# Altium PCB R100.230.070.001-00 Commutator.PcbDoc
Units mm, origin at the board's own origin, x right, y up, seen from the top; angles counter-clockwise.
Board outline 136 x 85 mm, 2 copper layers (Top, Bottom), stack 2.14 mm thick; 28 components, 21 nets, 83 pads, 192 vias.
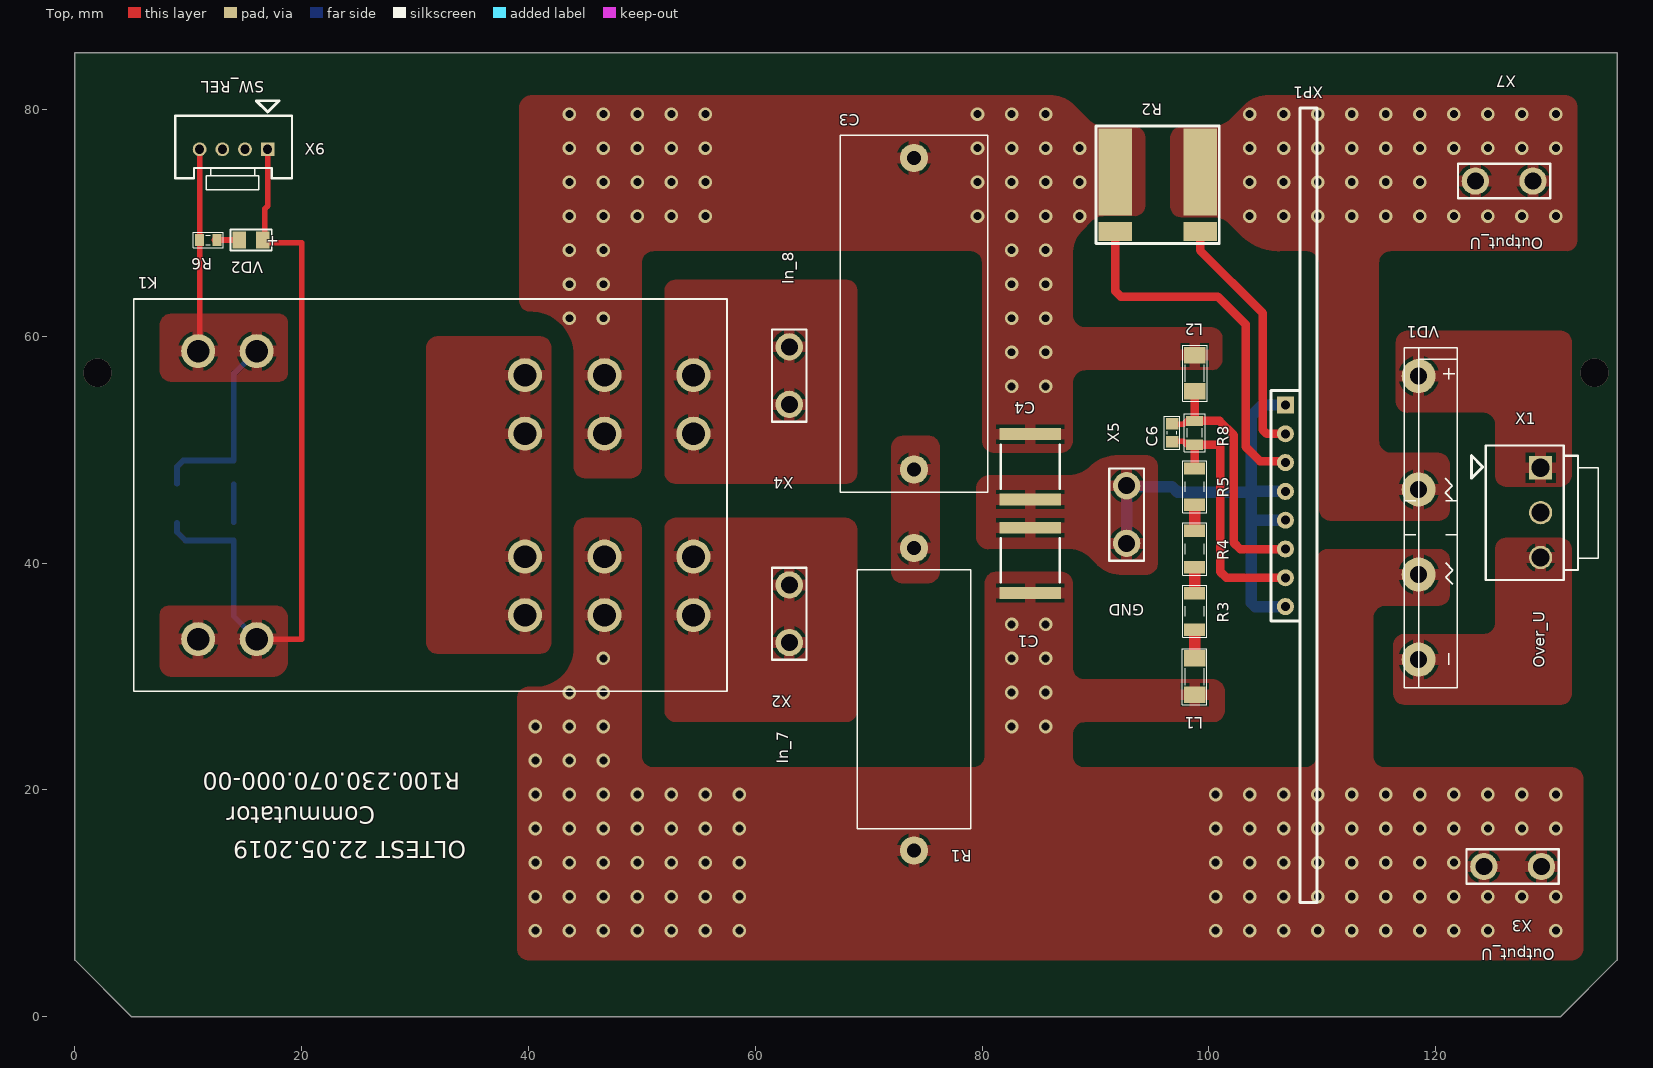
[diagram p0: Top view]
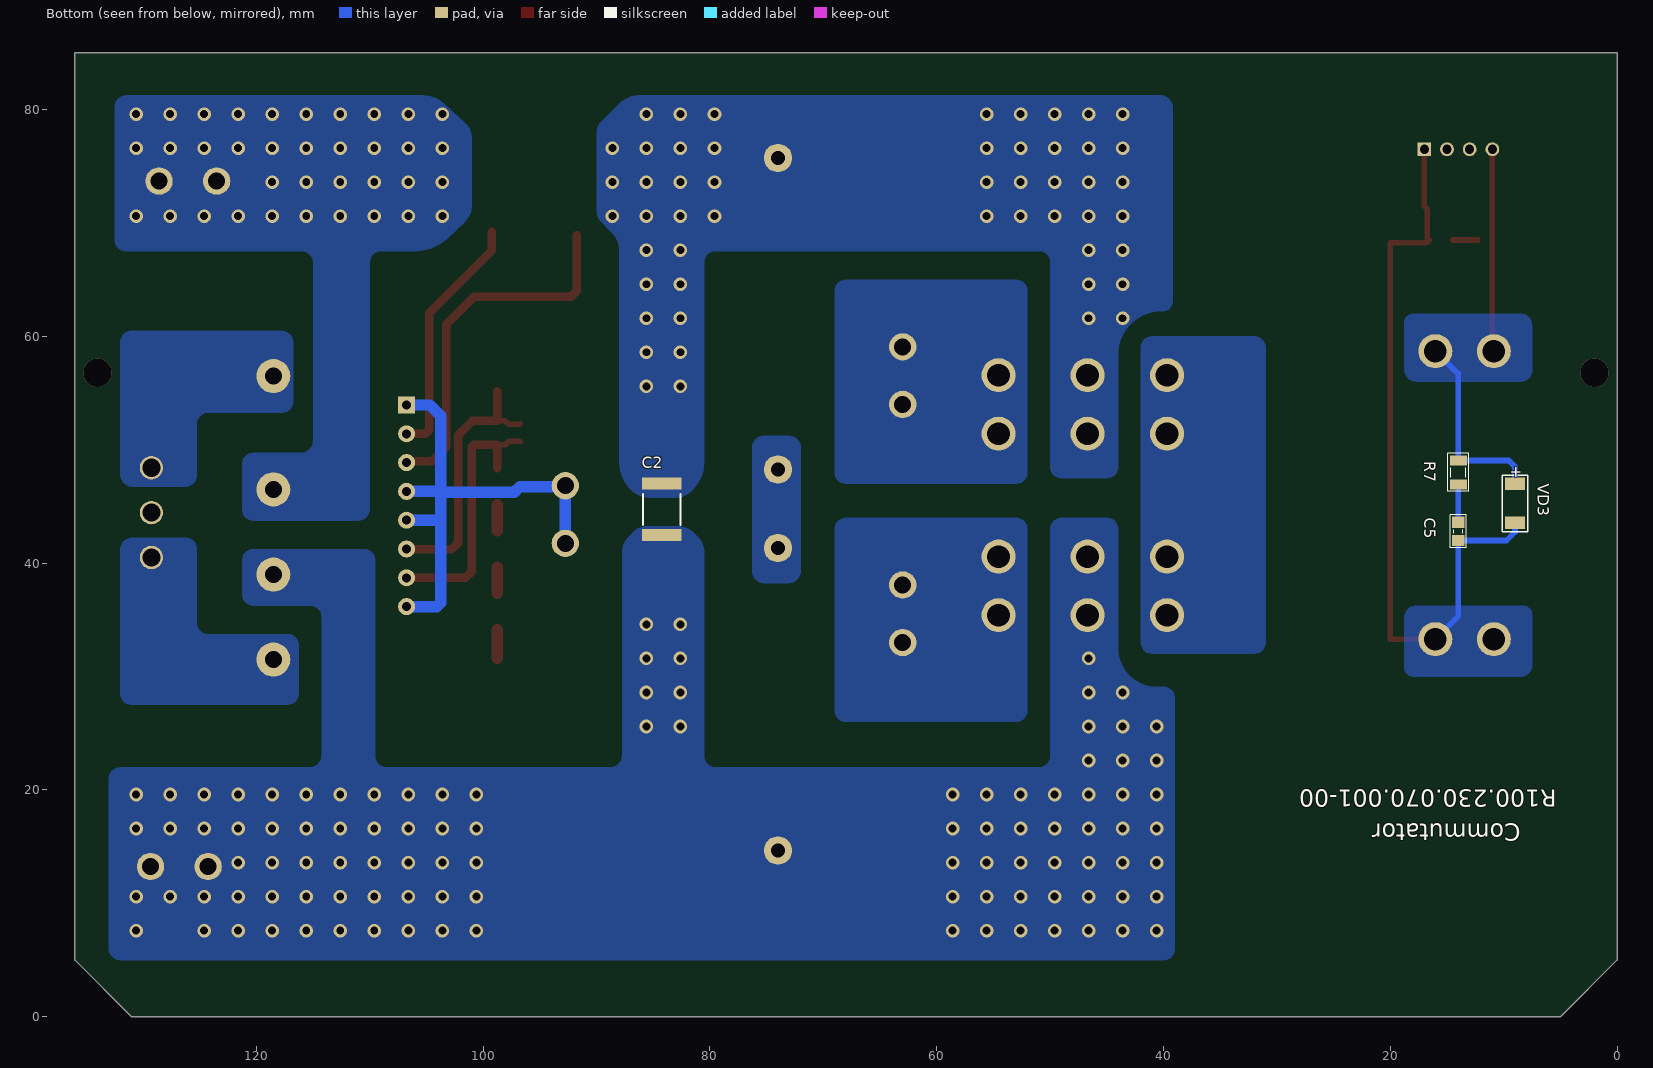
[diagram p1: Bottom view, seen from below]
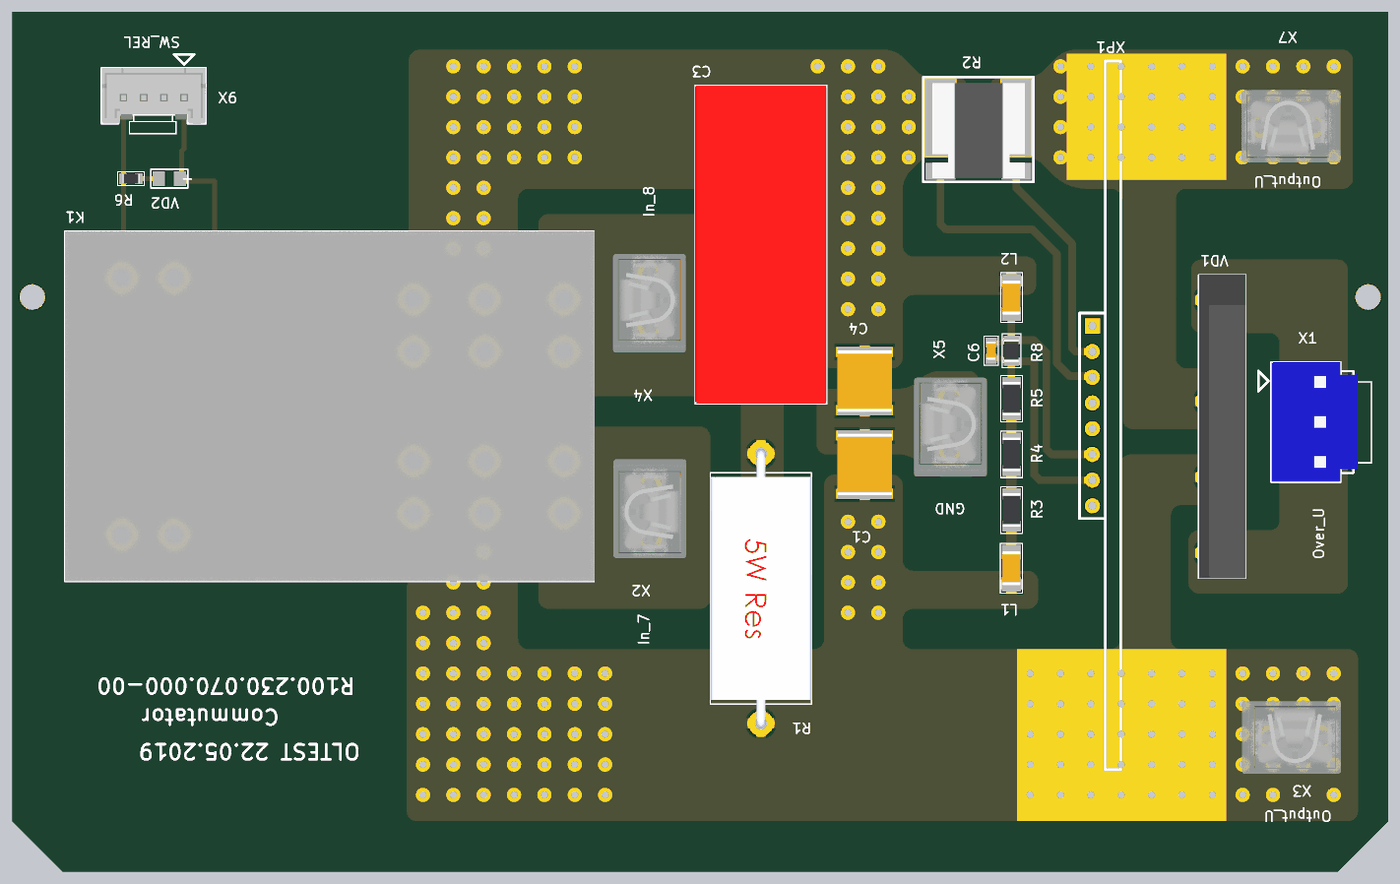
[diagram p2: 3D render of the assembled board from above, using the file's embedded part models]
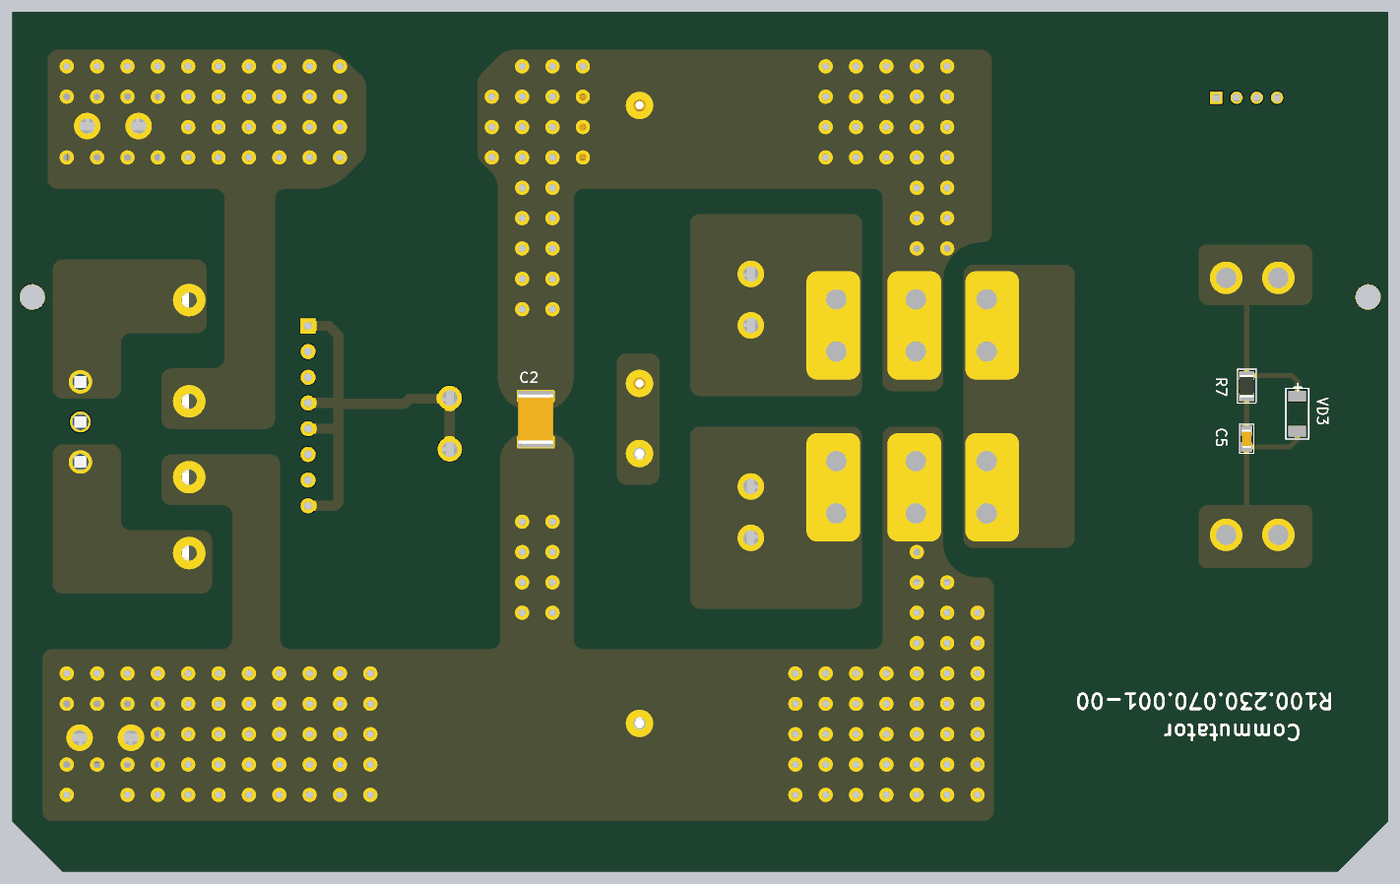
[diagram p3: 3D render of the assembled board from below, using the file's embedded part models]

## Layer stack, top to bottom
Top Solder: solder mask 0.0102, Solder Resist, Dk 3.5
Top: signal copper 0.07
Dielectric 1: dielectric 2, FR-4, Dk 4.8
Bottom: signal copper 0.07
Bottom Solder: solder mask 0.0102, Solder Resist, Dk 3.5

## Board outline
5,0 0,5 0,85 136,85 136,5 131,0

## Design rules (kind name [scope] priority, off if disabled: settings)
BoardOutlineClearance [All] p1: gap=0.5
Clearance Clearance_1 [(ObjectKind = 'Pad') And (Component = 'R2') And (Name = 'R2-4') vs InNet('VOUT-')] p1: gap=0.3
Clearance Clearance_Vout+- [InNet('VOUT+') or InNet('VOUT-')] p2: gap=1
Clearance Clearance_VOUT+-_4_+-Vin [InNet('VOUT+_4') or InNet('VOUT-_4') vs InNet('-VIN_200') or InNet('+VIN_200')] p3: gap=2
Clearance Clearance_VOUT+_4_VOUT-_4 [InNet('VOUT+_4') vs InNet('VOUT-_4')] p4: gap=2
Clearance Clearance_Vout_all [InNet('VOUT+_4') or InNet('VOUT-_4') or  InNet('VOUT+_3') or InNet('VOUT-_3') or InNet('VOUT+_2') or InNet('VOUT-_2') or InNet('VOUT+_1') or InNet('VOUT-_1') or InNet('VOUT+') or InNet('VOUT-')] p5: gap=1.2
Clearance Clearance_xp3_xp2_-Vin_200 [((ObjectKind = 'Pad') And (Component = 'XP3') And (Name = 'XP3-5')) or ((ObjectKind = 'Pad') And (Component = 'XP2') And (Name = 'XP2-5')) vs InNet('-VIN_200')] p6: gap=0.5
Clearance Clearance_+Vin_200_-Vin_200 [InNet('+VIN_200') vs InNet('-VIN_200')] p7: gap=2.2
Clearance Clearance_-Vin_200_All [InNet('-VIN_200') or InNet('+VIN_200')] p8: gap=1.2
Clearance [All] p9: gap=0.3 except(0.4: Arc-Poly Track-Poly SMDPad-Poly THPad-Poly Via-Poly Fill-Poly Poly-Poly)
ComponentClearance ComponentClearance_HS1 [(ObjectKind = 'Component') And (Name = 'HS1') or     (ObjectKind = 'Component') And (Name = 'HS2') or     (ObjectKind = 'Component') And (Name = 'HS3') or     (ObjectKind = 'Component') And (Name = 'HS4')] p1: gap=0.1 collisioncheckmode=3 verticalgap=0.1 showdistances=FALSE
ComponentClearance [All] p2: gap=0.254 collisioncheckmode=3 verticalgap=0.254 showdistances=FALSE
Height [All] p1: minheight=0 maxheight=63.5 prefheight=12.7
HoleSize [All] p1: absolutevalues=TRUE maxlimit=6.35 minlimit=0.025 maxpercent=80.000 minpercent=20.000
PolygonConnect PolygonConnect_shunt [(ObjectKind = 'Pad') And (Component = 'R2') And (Name = 'R2-1') or (ObjectKind = 'Pad') And (Component = 'R2') And (Name = 'R2-3')] p1: connectstyle=Direct reliefconductorwidth=0.254 reliefentries=4 polygonreliefangle="90 Angle" airgapwidth=0.254
PolygonConnect PolygonConnect_snnaber [(ObjectKind = 'Pad') And (Component = 'R2') And (Name = 'R2-1')  or (ObjectKind = 'Pad') And (Component = 'VD2') And (Name = 'VD2-2')  or(ObjectKind = 'Pad') And (Component = 'C29') And (Name = 'C29-2') or (ObjectKind = 'Poly') And (Net = 'NetC29_1') or (ObjectKind = 'Pad') And (Component = 'VD6') And (Name = 'VD6-2') or (ObjectKind = 'Pad') And (Component = 'R8') And (Name = 'R8-1') or (ObjectKind = 'Poly') And (Net = 'N2') And (Name = 'Top Overlay-No Net')] p2: connectstyle=Direct reliefconductorwidth=0.254 reliefentries=4 polygonreliefangle="90 Angle" airgapwidth=0.254
PolygonConnect PolygonConnect_1 [IsStitchingVia] p3: connectstyle=Direct reliefconductorwidth=0.254 reliefentries=4 polygonreliefangle="90 Angle" airgapwidth=0.254
PolygonConnect PolygonConnect_bottom_fill [OnLayer('Bottom')] p4: connectstyle=Direct reliefconductorwidth=0.254 reliefentries=4 polygonreliefangle="90 Angle" airgapwidth=0.254
PolygonConnect PoligonConnect_top [OnLayer('Top')] p5: connectstyle=Relief reliefconductorwidth=1 reliefentries=4 polygonreliefangle="90 Angle" airgapwidth=0.3
RoutingVias [All] p1: holewidth=0.7 width=1.2 viastyle="Through Hole" minholewidth=0.5 minwidth=1 maxholewidth=5.08 maxwidth=7.62
SolderMaskExpansion [All] p1: expansion=0.102
Width Width_+Vin_200 [InNet('+VIN_200')] p1: maxlimit=50 minlimit=0.762 preferedwidth=10 checkconnectedcopper=TRUE
Width [InNet('No Net')] p2: maxlimit=0.254 minlimit=0.254 preferedwidth=0.254
27 further rules are at their usual default settings.

## Components (designator, comment, footprint, x,y, rotation, side; value= is the part's Value field where it differs from the comment)
C1 "4700pF X1/Y2" SMD_C_2220 84.25,40.25 r270 top
C2 "0.1u" SMD_C_1812 84.25,44.75 r90 bottom
C3 "1uF 275VAC" MKP_W13_H24_L31.5_LS27.5 74,62 r270 top
C4 "4700pF X1/Y2" SMD_C_2220 84.25,48.5 r270 top
C5 "0.1u" SMD_C_0603 14,42.8 r270 bottom
C6 "100p" SMD_C_0603 96.75,51.5 r270 top
K1 "Value" T92S11 34,46 r90 top
L1 "BLM31PG601SN1" SMD_L_1206 98.75,30 r90 top
L2 "BLM31PG601SN1" SMD_L_1206 98.75,56.75 r270 top
R1 "4.7" "PRW 5W 1050" 74,28 r270 top
R2 "3mOm" "WSL3637 3mOm" 99.22,74.5 r180 top
R3 "30K" SMD_R_1206 98.75,35.75 r270 top
R4 "30K" SMD_R_1206 98.75,41.25 r270 top
R5 "30K" SMD_R_1206 98.75,46.75 r270 top
R6 "5K6" SMD_R_0603 11.75,68.5 r0 top
R7 "300" SMD_R_0805 14,48 r270 bottom
R8 "1.5K" SMD_R_0805 98.75,51.5 r270 top
VD1 "GBJ2560" GSIB-5S 118.5,44 r270 top
VD2 "LL-S172GC-2A" SMD_LED_LL_Green 15.541,68.5 r180 top
VD3 "PMLL4148" SOD80C 9,45.275 r270 bottom
X1 "B3P-VH" B3P-VH 129.25,48.42 r270 top
X2 "63849-1" 63849-1+insulator(154719-1) 63,38.08 r270 top
X3 "63849-1" 63849-1+insulator(154719-1) 124.25,13.25 r0 top
X4 "63849-1" 63849-1+insulator(154719-1) 63,54 r90 top
X5 "63849-1" 63849-1+insulator(154719-1) 92.75,41.75 r90 top
X6 "Sherlock 4" 35362-0450 17,76.5 r0 top
X7 "63849-1" 63849-1+insulator(154719-1) 128.58,73.7 r180 top
XP1 "То_MeasOutUIBoard" XP(MeasOutUIBoard) 106.75,45.06 r0 top

## Footprints (in the part's own frame and the unit in brackets; to place one, negate y for a bottom-side part, rotate by r counter-clockwise, add the part's x,y. Pads: shape width x height; smd on the part's side, far side on the other; paste and mask are expansions set on the pad)
35362-0450 [mil]
  rect 48x48 / inner round 0 / far side rect 48x48 hole 31.5 mask+4.97: 1(0,0)
  round 48 / inner round 0 / far side round 48 hole 31.5 mask+4.97: 2(-78.73,0) 3(-157.47,0) 4(-236.22,0)
  silkscreen extent -321,-140 85,168, body extent -321,-102 85,116, height 335
63849-1+insulator(154719-1) [mil]
  round 95 hole 59.06: 1(0,0) 2(200,0)
  silkscreen extent -60,-60 260,60, body extent -106,-141 279,142, height 955
B3P-VH [mm]
  rect 2.057x2.057 / inner round 0 / far side round 2.057 hole 1.6 mask+0.128: 1(0,0)
  round 2.057 / inner round 0 / far side round 2.057 hole 1.6 mask+0.128: 2(3.96,0) 3(7.92,0)
  silkscreen extent -1.95,-6.1 9.91,5.08, body extent -1.95,-4.78 9.87,3.72, height 10.93
GSIB-5S [mm]
  round 3 hole 1.5: 1(-12.5,0) 2(-2.5,0) 3(5,0) 4(12.5,0)
  silkscreen extent -15,-1.27 15,3.4, body extent -15,-1.2 15,3.4, height 28
MKP_W13_H24_L31.5_LS27.5 [mm]
  round 2.5 hole 1.2: 1(-13.735,0) 2(13.735,0)
  silkscreen extent -15.73,-6.5 15.77,6.5, body extent -15.76,-6.5 15.74,6.5, height 24
"PRW 5W 1050" [mm]
  round 2.5 hole 1.2: 1(-13.335,0) 2(13.335,0)
  silkscreen extent -11.43,-5 11.43,5, body extent -13.79,-5 13.78,5, height 10.01
SMD_C_0603 [mm]
  rect 1x1.1 smd: 1(-0.8,0) 2(0.8,0)
  silkscreen extent -1.45,-0.7 1.45,0.7, body extent -0.9,-0.45 0.9,0.45, height 0.7
SMD_C_1812 [mm] "Chip Capacitor, 2-Leads, Body 4,50x3,20mm, IPC Medium Density"
  rect 1.05x3.5 smd: 1(-2.275,0) 2(2.275,0)
  silkscreen extent -1.35,-1.65 1.35,1.65, body extent -2.45,-1.75 2.45,1.75, height 2
SMD_C_2220 [mm]
  rect 1.05x5.4 smd: 1(-2.875,0) 2(2.875,0)
  silkscreen extent -1.95,-2.6 1.95,2.6, body extent -3.05,-2.7 3.05,2.7, height 2
SMD_L_1206 [mm]
  rect 1.45x1.9 smd: 1(-1.6,0) 2(1.6,0)
  silkscreen extent -2.47,-1.07 2.45,1.1, body extent -1.7,-0.9 1.7,0.9, height 1.6
SMD_LED_LL_Green [mil] "Chip Diode, 2-Leads, Body 2,00x1,25mm, IPC Low Density"
  rect 47x59 smd: 1(-41,0) 2(41,0)
  silkscreen extent -72,-36 72,36, body extent -41,-27 41,27, height 31
SMD_R_0603 [mm]
  rect 0.8x1.05 smd: 1(-0.775,0) 2(0.775,0)
  silkscreen extent -1.33,-0.67 1.33,0.67, body extent -0.82,-0.48 0.82,0.48, height 0.5
SMD_R_0805 [mm]
  rect 0.9x1.5 smd: 1(-1.05,0) 2(1.05,0)
  silkscreen extent -1.68,-0.92 1.68,0.92, body extent -1.1,-0.7 1.1,0.7, height 0.5
SMD_R_1206 [mm]
  rect 1.1x1.85 smd: 1(-1.6,0) 2(1.6,0)
  silkscreen extent -2.3,-1.07 2.3,1.07, body extent -1.65,-0.87 1.65,0.87, height 0.6
SOD80C [mm] "MELF Diode, 2-Leads, Body 3,50x1,53mm, IPC Medium Density"
  rect 1.1x1.75 smd: 1(-1.725,0) 2(1.725,0)
  silkscreen extent -2.5,-1.12 2.5,1.12, body extent -1.85,-0.8 1.85,0.8, height 1.6
T92S11 [mm]
  round 3 hole 2: 0(12.7,23.13) 1(-12.7,23.13) 2(10.58,-20.55) 3(10.58,-5.69) 4(10.58,-12.7) 6(-10.58,-20.55) 7(-10.58,-5.69) 8(-10.58,-12.7) 10(12.7,17.97) 11(-12.7,17.97) 21(5.42,-20.55) 31(5.42,-5.69) 41(5.42,-12.7) 61(-5.42,-20.55) 71(-5.42,-5.69) 81(-5.42,-12.7)
  silkscreen extent -17.3,-23.5 17.3,28.8, body extent -17.27,-23.55 17.27,28.78, height 30.75
"WSL3637 3mOm" [mm]
  rect 2.95x7.64 smd: 1(0,0) 3(7.47,0)
  rect 2.95x1.66 smd: 2(0,5.26) 4(7.47,5.26)
  silkscreen extent -1.7,-4.05 9.18,6.32, body extent -0.87,-3.45 8.27,5.95, height 0.64
XP(MeasOutUIBoard) [mm]
  rect 1.5x1.5 hole 0.8: 1(0,8.89)
  round 1.5 hole 0.8: 2(0,6.35) 3(0,3.81) 4(0,1.27) 5(0,-1.27) 6(0,-3.81) 7(0,-6.35) 8(0,-8.89)
  silkscreen extent -1.27,-34.98 2.8,35.06, body extent -1.27,-34.98 2.79,35.06, height 45

## Part data
C1 C4: library part "C X1Y2 4700pF SMD 2220 250Vac 10%", "SMD C2220 MURATA 250Vac 10% X7R X1Y2"
C2: library part "C1812 0.1u 630V 10%", "SMD C 1812 MURATA 630V 10% X7R"
C3: library part "MKP-X2 1uF 275VAC +-20% L31.5 H24 W13 LS27.5", "Polypropelene MKP-X2 L31.5 H24 W13 LS27.5"
C5: library part "C0603 0.1u 50V 10%", "SMD C 0603 MURATA 50V 10% X7R"
C6: library part "C0603 100p 100V 5%", "SMD C 0603 MURATA 100V 5% NP0"
K1: library part T92S11D12-12, "400VAC 30A DPDT 24VDC"
L1 L2: "600R 1.5A (100MHz)"
R1: library part "PRW 4.7 5W +-5%", "Выводной PRW 5W 4R7 +-5%"
R2: library part "WSL3637 3mOm 3W", "WSL3637 1mOm 3W 1% 50ppm"
R3 R4 R5: library part "R1206 30K 0.1%", "SMD R 1206 VISHAY 0.25W 2000V 0.1% 25ppm"
R6: library part "R0603 5K6 1%", "SMD R 0603 VISHAY 0.1W 75V 1% 100ppm"
R7: library part "R0805 300 1%", "SMD R 0805 VISHAY 0.125W 150V 1% 100ppm"
R8: library part "R0805 1.5K 0.1%", "SMD R 0805 VISHAY 0.125W 150V 0.1% 25ppm"
VD1: "25A 600V"
VD2: "LED Green SMD"
VD3: "If=0.2A, Vf=1V Vrrm=100V Diode (SOD80C)"
X1: "VH Top, 10A 250V 3.96mm"
X2 X3 X4 X5 X7: "PCB, 6.3х0.8, hole"
X6: library part 35362-0450, "Sherlock 4 Top, 2A 125V 2mm"
XP1: library part Plata_MeasOutUIBoard, "to MeasOutUIBoard"

## Via types
v1: diameter 1.2/1.2 (per signal layer), hole 0.7, Top to Bottom, 190 vias
v2: diameter 2.5, hole 2.5, Top to Bottom, 2 vias

## Nets (pads, with @x,y where several pads share a name; then routed paths per layer and width w, separated by ;. In a path a pad name is that pad's centre, name@x,y a point inside that pad or via, vN(x,y) a via of type N, cw(c..) or ccw(c..) an arc to the next point about the centre after c; other vN are vias at no path point)
GND: C1.1 C4.2 X5.1 X5.2 XP1.1 XP1.4 XP1.5 XP1.8 | length 45.4
  Bottom w1: X5.1 X5.2 92.83,46.75 96.75,46.75 97.25,46.25 103.75,46.25 ; XP1.8 104.08,36.17 103.75,36.5 103.75,43.75 ; XP1.5 103.79,43.79 103.75,43.75 ; XP1.4 103.83,46.33 103.75,46.25 ; XP1.1 104.7,53.95 103.75,53 103.75,46.25 ; 103.75,43.75 103.75,46.25
I_U+: R2.2 XP1.2 | length 21.9
  Top w0.75: R2.2 99.22,67.58 104.75,62.05 104.75,51.75 105.09,51.41 XP1.2
I_U-: R2.4 XP1.3 | length 32.5
  Top w0.75: R2.4@91.75,68.9 91.75,64 92.25,63.5 100.8,63.5 103.25,61.05 103.25,50.25 104.5,49 106.62,49 XP1.3
N9: C3.2 R1.1
N10: L1.2 R3.2 | length 2.5
  Top w1: L1.2 R3.2
N11: R3.1 R4.2 | length 2.3
  Top w1: R3.1 R4.2
N12: R4.1 R5.2 | length 2.3
  Top w1: R4.1 R5.2
NetC5_1: C5.1 R7.2 | length 3.4
  Bottom w0.5: C5.1 R7.2
NetK1_2: K1.2 K1.21 X4.1 X4.2
NetK1_3: K1.3 K1.7 K1.31 K1.71
NetK1_6: K1.6 K1.61 X2.1 X2.2
NetR2_1: R2.1 VD1.2 X7.1 X7.2
  other v1: 103.6,70.6 106.6,70.6 109.6,70.6 112.6,70.6 115.6,70.6 118.6,70.6 121.6,70.6 124.6,70.6 127.6,70.6 130.6,70.6 103.6,73.6 106.6,73.6 109.6,73.6 112.6,73.6 115.6,73.6 118.6,73.6 103.6,76.6 106.6,76.6 109.6,76.6 112.6,76.6 115.6,76.6 118.6,76.6 121.6,76.6 124.6,76.6 127.6,76.6 130.6,76.6 103.6,79.6 106.6,79.6 109.6,79.6 112.6,79.6 115.6,79.6 118.6,79.6 121.6,79.6 124.6,79.6 127.6,79.6 130.6,79.6
NetR6_2: R6.2 VD2.2 | length 2.2
  Top w0.5: R6.2@12.275,68.5 VD2.2
NetVD1_1: VD1.1 X1.1
NetVD1_4: VD1.4 X1.3
SW_REL_COM: K1.0 K1.10 R6.1 R7.1 VD3.1 X6.4 | length 35.1
  Top w0.5: K1.0 11,58.83 X6.4
  Bottom w0.5: VD3.1 9,48.5 9.55,49.05 R7.1 14,56.75 14.08,56.75 K1.10
SW_REL_PLUS: C5.2 K1.1 K1.11 VD2.1 VD3.2 X6.1 | length 66.3
  Top w0.5: K1.11 20,33.3 20,68.25 16.833,68.25 VD2.1 16.75,68.667 16.75,71.25 17,71.5 X6.1
  Bottom w0.5: VD3.2 9,42.75 9.75,42 C5.2 14,35.33 K1.11
U_U+: C6.2 R5.1 R8.2 XP1.7 | length 23.6
  Top w0.5: C6.2 96.8,50.75 97.75,50.75 98.05,50.45 R8.2
  Top w0.75: R5.1 R8.2 100.8,50.45 101,50.25 101,39.25 101.54,38.71 XP1.7
U_U-: C6.1 L2.2 R8.1 XP1.6 | length 23
  Top w0.5: C6.1 96.8,52.25 97.75,52.25 98.05,52.55 R8.1
  Top w0.75: L2.2 R8.1 100.95,52.55 102.2,51.3 102.2,41.8 102.75,41.25 XP1.6
VOUT+: C1.2 C2.1 K1.8 K1.81 L1.1 R1.2 VD1.3 X3.1 X3.2
  other v1: 40.6,7.6 43.6,7.6 46.6,7.6 49.6,7.6 52.6,7.6 55.6,7.6 58.6,7.6 100.6,7.6 103.6,7.6 106.6,7.6 109.6,7.6 112.6,7.6 115.6,7.6 118.6,7.6 121.6,7.6 124.6,7.6 130.6,7.6 40.6,10.6 43.6,10.6 46.6,10.6 49.6,10.6 52.6,10.6 55.6,10.6 58.6,10.6 100.6,10.6 103.6,10.6 106.6,10.6 109.6,10.6 112.6,10.6 115.6,10.6 118.6,10.6 121.6,10.6 124.6,10.6 127.6,10.6 130.6,10.6 40.6,13.6 43.6,13.6 46.6,13.6 49.6,13.6 52.6,13.6 55.6,13.6 58.6,13.6 100.6,13.6 103.6,13.6 106.6,13.6 109.6,13.6 112.6,13.6 115.6,13.6 118.6,13.6 121.6,13.6 40.6,16.6 43.6,16.6 46.6,16.6 49.6,16.6 52.6,16.6 55.6,16.6 58.6,16.6 100.6,16.6 103.6,16.6 106.6,16.6 109.6,16.6 112.6,16.6 115.6,16.6 118.6,16.6 121.6,16.6 124.6,16.6 127.6,16.6 130.6,16.6 40.6,19.6 43.6,19.6 46.6,19.6 49.6,19.6 52.6,19.6 55.6,19.6 58.6,19.6 100.6,19.6 103.6,19.6 106.6,19.6 109.6,19.6 112.6,19.6 115.6,19.6 118.6,19.6 121.6,19.6 124.6,19.6 127.6,19.6 130.6,19.6 40.6,22.6 43.6,22.6 46.6,22.6 40.6,25.6 43.6,25.6 46.6,25.6 82.6,25.6 85.6,25.6 43.6,28.6 46.6,28.6 82.6,28.6 85.6,28.6 46.6,31.6 82.6,31.6 85.6,31.6 82.6,34.6 85.6,34.6
VOUT-: C2.2 C3.1 C4.1 K1.4 K1.41 L2.1 R2.3
  other v1: 82.6,55.6 85.6,55.6 82.6,58.6 85.6,58.6 43.6,61.6 46.6,61.6 82.6,61.6 85.6,61.6 43.6,64.6 46.6,64.6 82.6,64.6 85.6,64.6 43.6,67.6 46.6,67.6 82.6,67.6 85.6,67.6 43.6,70.6 46.6,70.6 49.6,70.6 52.6,70.6 55.6,70.6 79.6,70.6 82.6,70.6 85.6,70.6 88.6,70.6 43.6,73.6 46.6,73.6 49.6,73.6 52.6,73.6 55.6,73.6 79.6,73.6 82.6,73.6 85.6,73.6 88.6,73.6 43.6,76.6 46.6,76.6 49.6,76.6 52.6,76.6 55.6,76.6 79.6,76.6 82.6,76.6 85.6,76.6 88.6,76.6 43.6,79.6 46.6,79.6 49.6,79.6 52.6,79.6 55.6,79.6 79.6,79.6 82.6,79.6 85.6,79.6
pads on no net: X1.2 X6.2 X6.3
copper on no net:
  other v2: 2,56.8 134,56.8

## Polygon pours and split planes (outlines as drawn)
NetR2_1 on Bottom "Poly" (solid, pour order 234): 113.5,81.25 131.45,81.25 cw(c131.45,80.2) 132.5,80.2 132.5,68.5 cw(c131.5,68.5) 131.5,67.5 116,67.5 ccw(c116,66.5) 115,66.5 115,50.8 ccw(c116.05,50.8) 116.05,49.75 120.25,49.75 cw(c120.25,48.75) 121.25,48.75 121.25,44.75 cw(c120.25,44.75) 120.25,43.75 111.05,43.75 cw(c111.05,44.8) 110,44.8 110,66.5 ccw(c109,66.5) 109,67.5 106.105,67.5 cw(c106.105,71.92) 103.068,68.709 101.677,70.024 cw(c103.164,71.597) 101,71.597 101,77.41 cw(c102.972,77.41) 101.627,78.852 103.326,80.437 cw(c105.388,78.227) 105.388,81.25
VOUT- on Bottom "Poly" (solid, pour order 228): 45,47.5 49,47.5 ccw(c49,48.5) 50,48.5 50,66.6 cw(c50.9,66.6) 50.9,67.5 79.5,67.5 cw(c79.5,66.5) 80.5,66.5 80.5,49.121 ccw(c84.725,49.065) 80.8,47.5 ccw(c84.105,49.054) 81.646,46.354 ccw(c83.104,47.811) 83.104,45.75 85.255,45.75 ccw(c85.255,48.152) 86.954,46.454 ccw(c84.427,48.98) 88,48.98 88,67.534 cw(c90.331,67.534) 88.683,69.183 89.588,70.088 ccw(c88.593,71.083) 90,71.083 90,77.959 ccw(c88.693,77.959) 89.617,78.883 87.954,80.546 ccw(c86.255,78.848) 86.255,81.25 42.25,81.25 40.25,81.25 ccw(c40.25,80.2) 39.2,80.2 39.2,63.075 ccw(c40.066,63.075) 40.062,62.209 40.202,62.208 cw(c40.183,58.391) 44,58.391 44,58.251 44,48.5 ccw(c45,48.5)
VOUT+ on Bottom "Poly" (solid, pour order 226): 45,44 49,44 cw(c49,43) 50,43 50,24 50,23 ccw(c51,23) 51,22 52,22 79.5,22 ccw(c79.5,23) 80.5,23 80.5,40.876 cw(c82.61,40.876) 81.118,42.368 81.473,42.723 cw(c82.745,41.452) 82.745,43.25 85.596,43.25 cw(c85.597,41.673) 86.712,42.788 87.117,42.383 cw(c85.59,40.856) 87.75,40.855 87.75,23.05 ccw(c88.8,23.05) 88.8,22 108.5,22 ccw(c108.5,23) 109.5,23 109.5,40.2 cw(c110.55,40.2) 110.55,41.25 115.5,41.25 120.25,41.25 cw(c120.25,40.25) 121.25,40.25 121.25,37.25 cw(c120.25,37.25) 120.25,36.25 115.25,36.25 ccw(c115.25,35.25) 114.25,35.25 114.25,23.05 ccw(c115.3,23.05) 115.3,22 132,22 cw(c132,21) 133,21 133,6 cw(c132,6) 132,5 40,5 cw(c40,6) 39,6 39,28.1 cw(c40,28.1) 40,29.1 40.6,29.1 ccw(c40.6,32.5) 44,32.5 44,43 cw(c45,43)
NetVD1_1 on Bottom "Poly" (solid, pour order 238): 116.75,59.45 116.75,54.25 ccw(c117.75,54.25) 117.75,53.25 124.25,53.25 cw(c124.25,52.25) 125.25,52.25 125.25,47.75 ccw(c126.25,47.75) 126.25,46.75 130.95,46.75 ccw(c130.95,47.8) 132,47.8 132,59.5 ccw(c131,59.5) 131,60.5 117.8,60.5 ccw(c117.8,59.45)
NetK1_3 on Bottom "Poly" (solid, pour order 222): 32,60 41,60 cw(c41,59) 42,59 42,33 cw(c41,33) 41,32 32,32 cw(c32,33) 31,33 31,59 cw(c32,59)
NetK1_6 on Bottom "Poly" (solid, pour order 218): 52,43 52,27 ccw(c53,27) 53,26 68,26 ccw(c68,27) 69,27 69,43 ccw(c68,43) 68,44 53,44 ccw(c53,43)
NetK1_2 on Bottom "Poly" (solid, pour order 212): 52,64 52,48 ccw(c53,48) 53,47 68,47 ccw(c68,48) 69,48 69,64 ccw(c68,64) 68,65 53,65 ccw(c53,64)
NetVD1_4 on Bottom "Poly" (solid, pour order 240): 116.25,32.75 116.25,28.55 ccw(c117.3,28.55) 117.3,27.5 131,27.5 ccw(c131,28.5) 132,28.5 132,41.2 ccw(c130.95,41.2) 130.95,42.25 126.25,42.25 ccw(c126.25,41.25) 125.25,41.25 125.25,34.75 cw(c124.25,34.75) 124.25,33.75 117.25,33.75 ccw(c117.25,32.75)
SW_REL_COM on Bottom "Poly" (solid, pour order 248): 7.5,61 7.5,57 ccw(c8.5,57) 8.5,56 17.7,56 ccw(c17.7,57.05) 18.75,57.05 18.75,61.25 ccw(c18,61.25) 18,62 8.5,62 ccw(c8.5,61)
SW_REL_PLUS on Bottom "Poly" (solid, pour order 250): 7.5,35.5 7.5,31 ccw(c8.5,31) 8.5,30 18,30 ccw(c18,30.75) 18.75,30.75 18.75,35.25 ccw(c17.75,35.25) 17.75,36.25 8.25,36.25 ccw(c8.25,35.5)
N9 on Bottom "Poly" (solid, pour order 256): 72,50.2 72,39.3 ccw(c73.05,39.3) 73.05,38.25 75.25,38.25 ccw(c75.25,39.25) 76.25,39.25 76.25,50.25 ccw(c75.25,50.25) 75.25,51.25 73.05,51.25 ccw(c73.05,50.2)
VOUT+ on Top "Poly" (solid, pour order 224): 45,44 49,44 cw(c49,43) 50,43 50,25.704 50,23 ccw(c51,23) 51,22 53.124,22 79.2,22 ccw(c79.2,23.05) 80.25,23.05 80.25,38.25 cw(c81.25,38.25) 81.25,39.25 86.95,39.25 cw(c86.95,38.2) 88,38.2 88,30.8 ccw(c89.05,30.8) 89.05,29.75 100.35,29.75 cw(c100.35,28.7) 101.4,28.7 101.4,27 cw(c100.4,27) 100.4,26 89.1,26 ccw(c89.1,24.9) 88,24.9 88,23 ccw(c89,23) 89,22 108.5,22 ccw(c108.5,23) 109.5,23 109.5,40.2 cw(c110.55,40.2) 110.55,41.25 120.25,41.25 cw(c120.25,40.25) 121.25,40.25 121.25,37.25 cw(c120.25,37.25) 120.25,36.25 115.55,36.25 ccw(c115.55,35.2) 114.5,35.2 114.5,23 ccw(c115.5,23) 115.5,22 132,22 cw(c132,21) 133,21 133,6 cw(c132,6) 132,5 40,5 cw(c40,6) 39,6 39,28.1 cw(c40,28.1) 40,29.1 40.6,29.1 ccw(c40.6,32.5) 44,32.5 44,43 cw(c45,43)
VOUT- on Top "Poly" (solid, pour order 230): 45,47.5 49,47.5 ccw(c49,48.5) 50,48.5 50,66.5 cw(c51,66.5) 51,67.5 79,67.5 cw(c79,66.5) 80,66.5 80,50.8 ccw(c81.05,50.8) 81.05,49.75 86.95,49.75 ccw(c86.95,50.8) 88,50.8 88,55.9 cw(c89.1,55.9) 89.1,57 100.2,57 ccw(c100.2,58) 101.2,58 101.2,59.8 ccw(c100.2,59.8) 100.2,60.8 89.1,60.8 cw(c89.1,61.9) 88,61.9 88,67.334 cw(c90.814,67.334) 88.824,69.324 89.688,70.188 cw(c90.683,69.193) 90.683,70.6 93.4,70.6 ccw(c93.4,71.6) 94.4,71.6 94.4,77.5 ccw(c93.4,77.5) 93.4,78.5 90.924,78.5 cw(c90.924,80.731) 89.346,79.154 88.024,80.476 ccw(c86.156,78.608) 86.155,81.25 42.25,81.25 40.25,81.25 ccw(c40.25,80.2) 39.2,80.2 39.2,69.132 39.2,63.151 ccw(c40.151,63.151) 40.151,62.2 cw(c40.151,58.351) 44,58.351 44,48.5 ccw(c45,48.5)
NetK1_3 on Top "Poly" (solid, pour order 220): 32,60 41,60 cw(c41,59) 42,59 42,33 cw(c41,33) 41,32 32,32 cw(c32,33) 31,33 31,59 cw(c32,59)
NetK1_6 on Top "Poly" (solid, pour order 216): 53,44 67.9,44 cw(c67.9,42.9) 69,42.9 69,27 cw(c68,27) 68,26 53,26 cw(c53,27) 52,27 52,43 cw(c53,43)
NetK1_2 on Top "Poly" (solid, pour order 214): 52,64 52,48 ccw(c53,48) 53,47 68,47 ccw(c68,48) 69,48 69,64 ccw(c68,64) 68,65 53,65 ccw(c53,64)
GND on Top "Poly" (solid, pour order 236): 79.5,46.6 79.5,42.3 ccw(c80.55,42.3) 80.55,41.25 87.655,41.25 cw(c87.655,38.607) 89.524,40.476 90.105,39.895 ccw(c92.266,42.056) 92.266,39 94.5,39 ccw(c94.5,40) 95.5,40 95.5,48.5 ccw(c94.5,48.5) 94.5,49.5 91.838,49.5 ccw(c91.838,46.269) 89.554,48.554 cw(c87.614,50.493) 87.614,47.75 80.65,47.75 ccw(c80.65,46.6)
NetR2_1 on Top "Poly" (solid, pour order 232): 100.134,78.5 97.6,78.5 ccw(c97.6,77.5) 96.6,77.5 96.6,71.5 ccw(c97.6,71.5) 97.6,70.5 100.476,70.5 cw(c100.476,68.631) 101.797,69.953 102.831,68.919 ccw(c106.257,72.345) 106.257,67.5 108.6,67.5 cw(c108.6,66.35) 109.75,66.35 109.75,44.75 ccw(c110.75,44.75) 110.75,43.75 120.25,43.75 ccw(c120.25,44.75) 121.25,44.75 121.25,48.65 ccw(c120.15,48.65) 120.15,49.75 116.05,49.75 cw(c116.05,50.8) 115,50.8 115,66.5 cw(c116,66.5) 116,67.5 131.5,67.5 ccw(c131.5,68.5) 132.5,68.5 132.5,80.2 ccw(c131.45,80.2) 131.45,81.25 105.104,81.25 ccw(c105.103,78.586) 103.22,80.47 102.039,79.289 cw(c100.134,81.193)
NetVD1_4 on Top "Poly" (solid, pour order 242): 116.25,32.75 116.25,28.55 ccw(c117.3,28.55) 117.3,27.5 131,27.5 ccw(c131,28.5) 132,28.5 132,41.2 ccw(c130.95,41.2) 130.95,42.25 126.25,42.25 ccw(c126.25,41.25) 125.25,41.25 125.25,34.75 cw(c124.25,34.75) 124.25,33.75 117.25,33.75 ccw(c117.25,32.75)
NetVD1_1 on Top "Poly" (solid, pour order 244): 116.5,59.5 116.5,54.3 ccw(c117.55,54.3) 117.55,53.25 124.25,53.25 cw(c124.25,52.25) 125.25,52.25 125.25,47.75 ccw(c126.25,47.75) 126.25,46.75 130.95,46.75 ccw(c130.95,47.8) 132,47.8 132,59.5 ccw(c131,59.5) 131,60.5 117.5,60.5 ccw(c117.5,59.5)
SW_REL_COM on Top "Poly" (solid, pour order 246): 7.5,61 7.5,57 ccw(c8.5,57) 8.5,56 18,56 ccw(c18,56.75) 18.75,56.75 18.75,61.25 ccw(c18,61.25) 18,62 8.5,62 ccw(c8.5,61)
SW_REL_PLUS on Top "Poly" (solid, pour order 254): 7.5,35.5 7.5,31 ccw(c8.5,31) 8.5,30 17.5,30 ccw(c17.5,31.25) 18.75,31.25 18.75,35.25 ccw(c17.75,35.25) 17.75,36.25 8.25,36.25 ccw(c8.25,35.5)
N9 on Top "Poly" (solid, pour order 258): 72,50.2 72,39.2 ccw(c72.95,39.2) 72.95,38.25 75.25,38.25 ccw(c75.25,39.25) 76.25,39.25 76.25,50.25 ccw(c75.25,50.25) 75.25,51.25 73.05,51.25 ccw(c73.05,50.2)
no net on Bottom Solder "Poly" (solid): 52.2,42.3 52.2,33.7 ccw(c53.25,33.7) 53.25,32.65 56.45,32.65 ccw(c56.45,33.7) 57.5,33.7 57.5,42.3 ccw(c56.45,42.3) 56.45,43.35 53.25,43.35 ccw(c53.25,42.3)
no net on Bottom Solder "Poly" (solid): 44.2,42.3 44.2,33.7 ccw(c45.25,33.7) 45.25,32.65 48.45,32.65 ccw(c48.45,33.7) 49.5,33.7 49.5,42.3 ccw(c48.45,42.3) 48.45,43.35 45.25,43.35 ccw(c45.25,42.3)
no net on Bottom Solder "Poly" (solid): 52.2,58.3 52.2,49.7 ccw(c53.25,49.7) 53.25,48.65 56.45,48.65 ccw(c56.45,49.7) 57.5,49.7 57.5,58.3 ccw(c56.45,58.3) 56.45,59.35 53.25,59.35 ccw(c53.25,58.3)
no net on Bottom Solder "Poly" (solid): 44.2,58.3 44.2,49.7 ccw(c45.25,49.7) 45.25,48.65 48.45,48.65 ccw(c48.45,49.7) 49.5,49.7 49.5,58.3 ccw(c48.45,58.3) 48.45,59.35 45.25,59.35 ccw(c45.25,58.3)
no net on Bottom Solder "Poly" (solid): 36.5,58.3 36.5,49.7 ccw(c37.55,49.7) 37.55,48.65 40.75,48.65 ccw(c40.75,49.7) 41.8,49.7 41.8,58.3 ccw(c40.75,58.3) 40.75,59.35 37.55,59.35 ccw(c37.55,58.3)
no net on Bottom Solder "Poly" (solid): 36.5,42.3 36.5,33.7 ccw(c37.55,33.7) 37.55,32.65 40.75,32.65 ccw(c40.75,33.7) 41.8,33.7 41.8,42.3 ccw(c40.75,42.3) 40.75,43.35 37.55,43.35 ccw(c37.55,42.3)

## Silkscreen, mask and mechanical layers (free items; w line width, h text height)
Top Overlay:
  text "SW_REL" at 16.7,82.5 h1 r180
  text "Output_U" at 129.5,68.7 h1 r180
  text "In_8" at 63.4,64.6 h1 r90
  text "GND" at 94.3,36.4 h1 r180
  text "Over_U" at 129.6,30.8 h1 r90
  text "In_7" at 62.9,22.3 h1 r90
  text "R100.230.070.000-00" at 33.996,21.5 h1.5 r180
  text "Commutator" at 26.5,18.5 h1.5 r180
  text "OLTEST 22.05.2019" at 34.5,15.5 h1.5 r180
  text "Output_U" at 130.5,6 h1 r180
Bottom Overlay:
  text "R100.230.070.001-00" at 5.311,20 h1.5 r180
  text "Commutator" at 8.5,17 h1.5 r180
Top Solder:
  rectangle: 104.2,68.4 120,80.85
  rectangle: 99.3,5 120,22
Board:
  the board outline again, w0.254

## Text inside footprints (layer, text, board x,y; h text height)
VD2: Top Overlay "+" at 18.041,68.85 h1 r180
VD3: Bottom Overlay "+" at 9.325,48.6 h1 r90